# Altium PCB 无线调试增加.PcbDoc (part 1 of 2)
Units mil, origin at the board's own origin, x right, y up, seen from the top; angles counter-clockwise.
Board outline 3239.62 x 1968.5 mil, 2 copper layers (Top Layer, Bottom Layer); 90 components, 69 nets, 339 pads, 117 vias.
Unrouted connection lines stored in the file: 3.
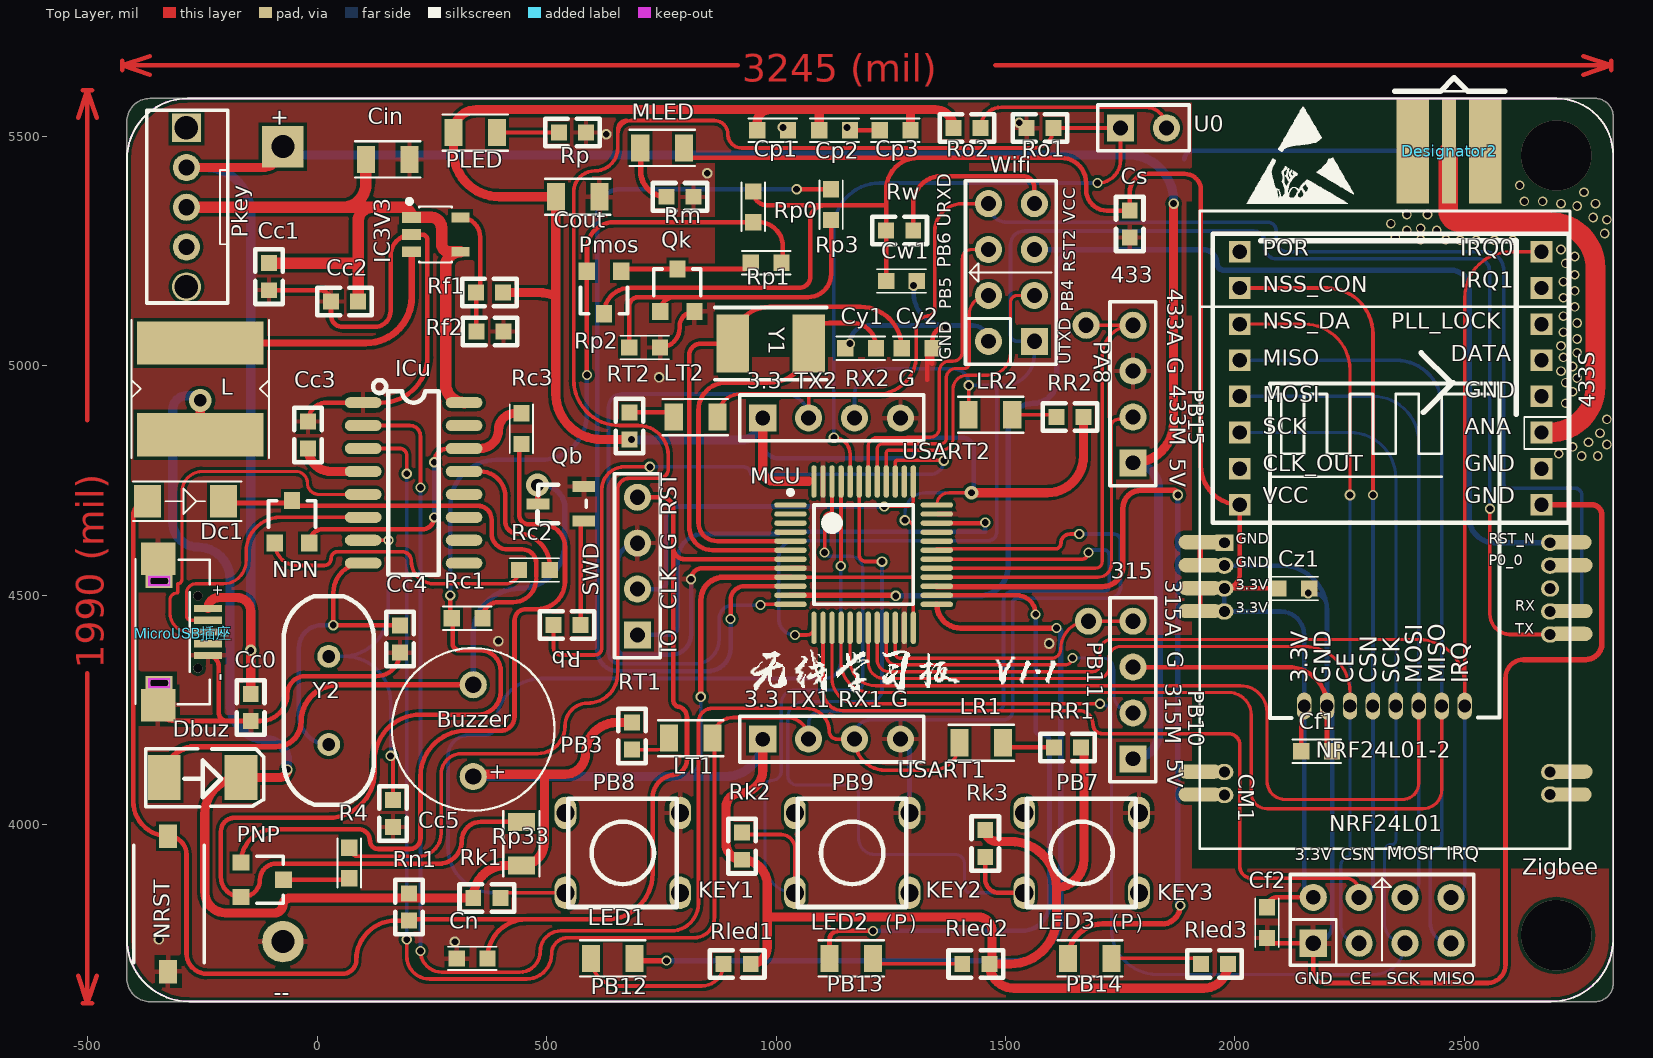
[diagram p0: Top Layer view]
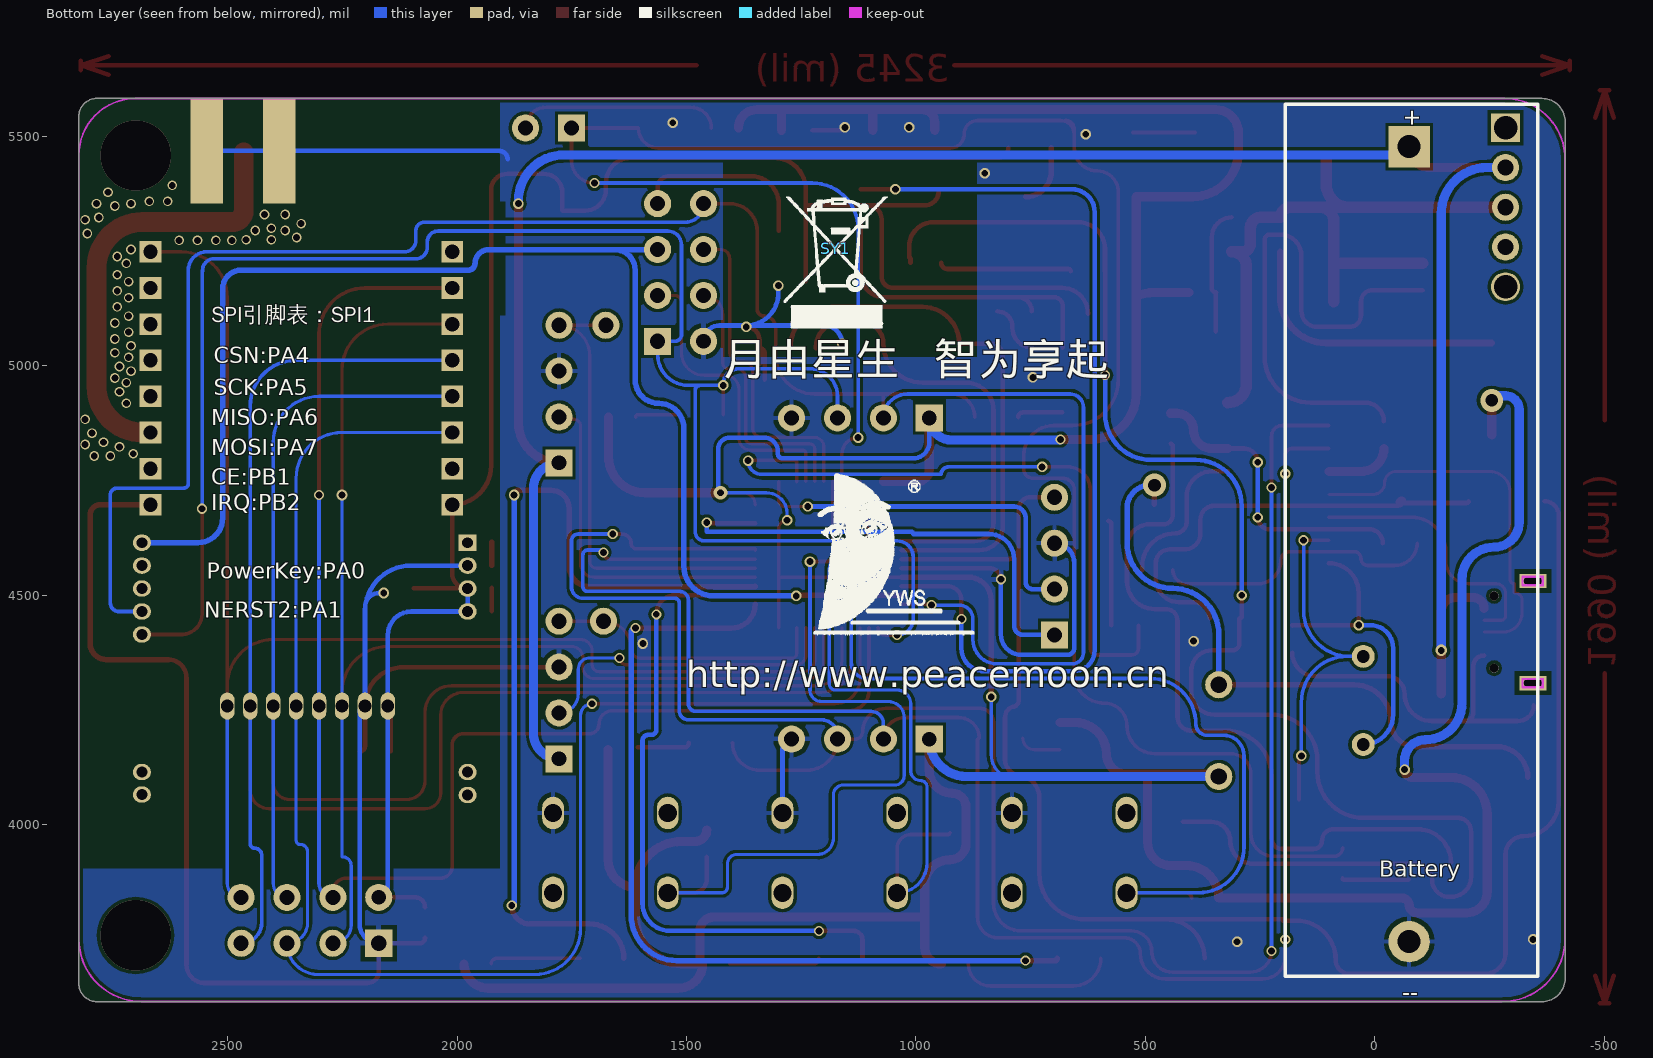
[diagram p1: Bottom Layer view, seen from below]

## Layer stack, top to bottom
Top Layer: signal copper 1.4
Dielectric: dielectric 12.6, FR-4, Dk 4.8
Bottom Layer: signal copper 1.4

## Board outline
-200,5582.96 2785.25,5582.96 cw(c2785.25,5543.59) 2824.62,5543.59 2824.62,3653.83 cw(c2785.25,3653.83) 2785.25,3614.46 -365,3614.46 cw(c-365,3664.46) -415,3664.46 -415,5532.96 cw(c-365,5532.96) -365,5582.96 -200,5582.96

## Design rules (kind name [scope] priority, off if disabled: settings)
Clearance [All] p1: gap=7
PolygonConnect [All] p1: connectstyle=Relief reliefconductorwidth=10 reliefentries=4 polygonreliefangle="90 Angle" airgapwidth=10
RoutingVias [All] p1: holewidth=28 width=50 viastyle="Through Hole" minholewidth=28 minwidth=50 maxholewidth=28 maxwidth=50
SolderMaskExpansion [All] p1: expansion=4
Width [All] p1: maxlimit=787.4 minlimit=7 preferedwidth=10
28 further rules are at their usual default settings.

## Classes and differential pairs
component class 无线调试版: 315 433 433S Battery Buzzer Cin Cn Cout Cp1 Cp2 Cp3 Cs Cy1 Cy2 Dbuz IC3V3 KEY1 KEY2 KEY3 LED1 LED2 LED3 LR1 LR2 LT1 LT2 MCU MLED NRF24L01 NRF24L01-2 NRST Pkey PLED Qb Rb Rf1 Rf2 Rk1 Rk2 Rk3 Rled1 Rled2 Rled3 Rm Rn1 Ro1 Ro2 Rp RR1 RR2 RT1 RT2 Rw SWD SY1 U0 USART1 USART2 Wifi Y1 Zigbee

## Components (designator, comment, footprint, x,y, rotation, side; value= is the part's Value field where it differs from the comment)
315 "2.54*4" 2.54*4 1775.95,4333.58 r90 top
433 "2.54*4" 2.54*4 1775.95,4978.58 r90 top
433S "思卡乐433核心板" 思卡乐433核心板 2010.95,5248.58 r0 top
Battery "锂电池座子（网蜂）" 锂电池插座（网蜂） -305,5520 r270 bottom locked
Buzzer "3V小蜂鸣器" 3V小蜂鸣器 340,4105 r90 top
Cc0 "" 0603A -145,4285 r270 top
Cc1 "104" 0603A -105,5165 r90 top
Cc2 "" 0603A 30,5140 r0 top
Cc3 "104" 0603A -20,4820 r90 top
Cc4 "22pf" 0603A 180,4375 r90 top
Cc5 "22pf" 0603A 165,3995 r90 top
Cf1 "104" 0603 2145,4160 r90 top (schematic designator Cp3)
Cf2 "104" 0603 2070,3820 r0 top (schematic designator Cp3)
Cin "10uf" 0805 110,5450 r270 top
Cn "104" 0603 370.95,3708.58 r270 top
Cout "22uf" 0805 610.95,5368.58 r90 top
Cp1 "104" 0603 1025.95,5513.58 r270 top
Cp2 "104" 0603 1160.95,5513.58 r270 top
Cp3 "104" 0603 1225.95,5513.58 r90 top
Cs "104" 0603A 1770.95,5338.58 r270 top
Cw1 "104" 0603 1240,5185 r90 top (schematic designator Cp3)
Cy1 "10-30P" 0603 1150.95,5038.58 r90 top
Cy2 "10-30P" 0603 1340.95,5038.58 r270 top
Cz1 "104" 0603 2095,4515 r90 top (schematic designator Cp3)
Dbuz "RB521S" 贴片二极管 -115,4100 r0 top
Dc1 "4148" DIO -370,4705 r0 top
Designator2 "Comment" 433天线 2338,5398.58 r0 top
IC3V3 "L408-3.3" SOT-23-5 205.95,5323.58 r270 top
ICu "CH340G" CH340G 210,4745 r0 top (schematic designator CH340G)
KEY1 "key4" key4 665.95,3938.58 r0 top
KEY2 "key4" key4 1165.94,3938.58 r0 top
KEY3 "key4" key4 1665.95,3938.58 r0 top
L "Comment" "774 2.2UH" -185,4830 r90 top
LED1 "LED" 0805 600.95,3708.58 r270 top
LED2 "LED" 0805 1207.61,3708.58 r90 top
LED3 "LED" 0805 1727.65,3708.58 r90 top
LR1 "LED" 0805 1490.95,4178.58 r90 top
LR2 "LED" 0805 1510.95,4893.58 r90 top
LT1 "LED" 0805 770.95,4188.58 r270 top
LT2 "LED" 0805 780.95,4888.58 r270 top
MCU "F0-MCU" STM32F103C8 1620.95,4558.58 r0 top
MicroUSB插座 "MicroUSB插座" MICRO-USB（带孔） -325,4420 r270 top
MLED "LED" 0805 795,5475 r90 top
NPN "9013" SOT23#1 -105,4660 r0 top
NRF24L01 "NRF24L01直插" NFR24L01直插 2320.95,3793.58 r0 top
NRF24L01-2 "NRF24L01贴片" nrf2401贴片 2150.95,4258.58 r0 top
NRST "KEY" KEY -325,3975 r270 top
Pkey "五孔开关" 五孔小开关 -285,5345 r270 top
PLED "LED" 0805 300.95,5508.58 r270 top
Pmos "AO3413" AO3413 625,5160 r180 top
PNP "PNP" SOT23#1 -120,3930 r270 top
Qb "9013" SOT23#2 540,4695 r270 top
Qk "9013" 9013 785,5165 r0 top
R4 "" 0603 70,3950 r0 top
Rb "1K" 0603A 515,4435 r0 top
Rc1 "" 0603 360,4450 r270 top
Rc2 "" 0603 440,4555 r90 top
Rc3 "" 0603 445,4830 r180 top
Rf1 "560R" 0603A 405,5160 r180 top
Rf2 "120R" 0603A 346.89,5075 r0 top
Rk1 "10K" 0603A 340,3840 r0 top
Rk2 "10K" 0603A 925.95,3923.58 r90 top
Rk3 "10K" 0603A 1455.95,3988.58 r270 top
Rled1 "560R" 0603A 885.85,3696.65 r0 top
Rled2 "560R" 0603A 1405.9,3696.65 r0 top
Rled3 "560R" 0603A 1925.94,3696.65 r0 top
Rm "1K" 0603A 760.95,5368.58 r0 top
Rn1 "10K" 0603A 200,3850 r270 top
Ro1 "10K" 0603A 1545.95,5518.58 r0 top
Ro2 "1K" 0603A 1445.95,5518.58 r180 top
Rp "1k" 0603A 585.95,5508.58 r180 top
Rp0 "0R" 0603 950.56,5313.31 r180 top
Rp1 "10k" 0603 945,5225 r90 top
Rp2 "10K" 0603 680,5040 r90 top
Rp3 "1K" 0603 1120,5385 r0 top
Rp33 "Comment" 0805 445,3915 r0 top
RR1 "560R" 0603A 1605.95,4168.58 r0 top
RR2 "560R" 0603A 1610.95,4888.58 r0 top
RT1 "560R" 0603A 685.95,4163.58 r90 top
RT2 "560R" 0603A 680.95,4898.58 r270 top
Rw "控制电流防止发热" 0603A 1240,5295 r0 top
SWD "2.54*4" 2.54*4 695.95,4603.58 r90 top
SY1 "PAD_1" HS 1175,5255 r180 bottom
U0 "二角跳帽" 二角跳帽 1750.95,5518.58 r0 top
USART1 "2.54*4" 2.54*4 1160.95,4188.58 r0 top
USART2 "2.54*4" 2.54*4 1160.95,4888.58 r0 top
Wifi "Wifi（20）" Wifi（20） 590.95,5373.58 r90 top (schematic designator Wifi2)
Y1 "8M" Crystal 1070.95,5048.58 r270 top
Y2 "12M" XTAL_US 25,4175 r90 top
Zigbee "Zigbee_S" Zigebee_S 2320.95,4518.58 r0 top

## Footprints (in the part's own frame and the unit in brackets; to place one, negate y for a bottom-side part, rotate by r counter-clockwise, add the part's x,y. Pads: shape width x height; smd on the part's side, far side on the other; paste and mask are expansions set on the pad)
2.54*4 [mil]
  rect 59.06x59.06 hole 32: 1(-190,-2)
  round 59.06 hole 33: 2(-90,-2) 3(10,-2) 4(110,-2)
  silkscreen extent -240,-52 161,48
3V小蜂鸣器 [mm]
  round 1.5 hole 0.9: 1(0,0) 2(5.08,0)
  silkscreen extent -1.89,-4.5 7.11,4.5
433天线 [mm]
  rect 1.8x5.8 smd: 1(1.27,1.778) 3(5.27,1.778)
  rect 0.8x5.8 smd: 2(3.27,1.778)
  rect 1.8x5.8 smd far side: 4(1.27,1.778) 5(5.27,1.778)
  rect 1.8x5.8 on Top Solder: 11(1.27,1.778) 33(5.27,1.778)
  rect 0.8x5.8 on Top Solder: 22(3.27,1.778)
  rect 1.8x5.8 on Bottom Solder: 44(1.27,1.778) 55(5.334,1.778)
  silkscreen extent 0.25,-1.52 6.35,5.84
0603 [mm]
  rect 0.9x0.9 smd: 1(0,0) 2(0,-1.7)
  silkscreen extent -0.65,-2.2 0.65,0.5, body extent -0.5,-1.59 0.5,-0.19, height 0.7
0603A [mm]
  rect 0.88x0.88 smd: 1(0,0) 2(1.5,0)
  silkscreen extent -0.76,-0.76 2.26,0.76, body extent 0,-0.54 1.5,0.54, height 1.45
"774 2.2UH" [mil]
  rect 94.49x275.59 smd: 1(20,70) 2(220,70)
  silkscreen extent -30,-80 270,220
0805 [mm]
  rect 1.5x1 smd: 1(0,-0.1) 2(0,2.311)
  silkscreen extent -1,-0.7 1,2.9, body extent -0.76,0.13 0.76,2.16, height 0.8
9013 [mm]
  rect 0.9x0.95 smd: 1(-0.95,-1.175) 2(0.95,-1.175) 3(0,1.175)
  silkscreen extent -1.3,-0.3 1.3,1.18
AO3413 [mm]
  rect 0.9x0.95 smd: 1(-0.95,-1.175) 2(0.95,-1.175) 3(0,1.175)
  silkscreen extent -1.3,-0.3 1.3,1.18
CH340G [mil]
  oval 80x24 smd: 1(-110,175) 2(-110,125) 3(-110,75) 4(-110,25) 5(-110,-25) 6(-110,-75) 7(-110,-125) 8(-110,-175) 9(110,-175) 10(110,-125) 11(110,-75) 12(110,-25) 13(110,25) 14(110,75) 15(110,125) 16(110,175)
  silkscreen extent -88,-200 55,224
Crystal [mm]
  rect 3.2x1.8 smd: 1(0,0) 2(0,-4.2)
  silkscreen extent -2,-5.2 2,1, body extent -2.03,-4.95 2.03,0.76, height 1.5
DIO [mm]
  rect 1.5x1.8 smd: A(0,0) K(4.2,0)
  silkscreen extent -0.8,-1.1 5.2,1.1
HS [mil]
  silkscreen extent -113,-173 113,113
KEY [mm]
  rect 1.3x1 smd: 1(0,0) 2(7.5,0)
  silkscreen extent 0.5,-1.9 7,2
key4 [mm]
  oval 1.2x1.8 hole 1: 1(-3.175,-2.21) 2(-3.175,2.21) 3(3.175,-2.21) 4(3.175,2.21)
  silkscreen extent -3.02,-3 3,3
MICRO-USB（带孔） [mm]
  rect 0.4x1.55 smd: 1(-1.3,2.2) 2(-0.65,2.2) 3(0,2.2) 4(0.65,2.2) 5(1.3,2.2)
  rect 1.8x1.9 smd: 6(-4.05,-0.55) 6(4.05,-0.55)
  rect 0.8x1.5 hole 0.4 slot 1 at 90 deg: 6(-2.825,-0.5) 6(2.825,-0.5)
  round 0.5 hole 0.5 unplated: ""(-2,1.65) ""(2,1.65)
  Keep-Out Layer lines w0.127: 3.054,-1.043 2.596,-1.043 2.596,0.075 3.054,0.075 3.054,-1.043 ; -2.596,-1.043 -3.054,-1.043 -3.054,0.075 -2.596,0.075 -2.596,-1.043
  silkscreen extent -4.05,-1.8 4,2.3
NFR24L01直插 [mil]
  rect 59.06x59.06 hole 33: 1(-150,-52)
  round 59.06 hole 32: 2(-150,48)
  round 59.06 hole 33: 3(-50,-52) 4(-50,48) 5(50,-52) 6(50,48) 7(150,-52) 8(150,48)
  silkscreen extent -200,-100 200,98
nrf2401贴片 [mm]
  oval 0.8x1.5 hole 0.7: 1(0,0) 2(1.27,0) 3(2.54,0) 4(3.81,0) 5(5.08,0) 6(6.35,0) 7(7.62,0) 8(8.89,0)
  silkscreen extent -1.88,-0.66 10.82,17.86
SOT23#1 [mm]
  rect 0.9x0.95 smd: 1(0.32,-1.175) 2(2.22,-1.175) 3(1.27,1.175)
  silkscreen extent -0.03,-0.3 2.57,1.18
SOT23#2 [mm]
  rect 0.6x1.27 smd: 1(0.84,1.04) 2(-1.065,1.04) 3(-0.1,-1.5)
  silkscreen extent -1.18,-1.52 0.97,1.17, body extent -1.56,-0.86 1.36,0.86, height 1.5
SOT-23-5 [mm]
  rect 0.6x1.05 smd: 1(0,0) 2(0.95,0) 3(1.9,0)
  rect 0.55x1 smd: 4(1.9,2.7) 5(0,2.7)
  silkscreen extent -1.01,-0.25 2.49,2.22, body extent -0.49,0 2.41,2.8, height 1.09
STM32F103C8 [mm]
  oval 1.8x0.3 smd: 1(-14.972,3.512) 2(-14.972,3.012) 3(-14.972,2.512) 4(-14.972,2.012) 5(-14.972,1.512) 6(-14.972,1.012) 7(-14.972,0.512) 8(-14.972,0.012) 9(-14.972,-0.488) 10(-14.972,-0.988) 11(-14.972,-1.488) 12(-14.972,-1.988) 25(-6.872,-1.988) 26(-6.872,-1.488) 27(-6.872,-0.988) 28(-6.872,-0.488) 29(-6.872,0.012) 30(-6.872,0.512) 31(-6.872,1.012) 32(-6.872,1.512) 33(-6.872,2.012) 34(-6.872,2.512) 35(-6.872,3.012) 36(-6.872,3.512)
  oval 0.3x1.8 smd: 13(-13.672,-3.288) 14(-13.172,-3.288) 15(-12.672,-3.288) 16(-12.172,-3.288) 17(-11.672,-3.288) 18(-11.172,-3.288) 19(-10.672,-3.288) 20(-10.172,-3.288) 21(-9.672,-3.288) 22(-9.172,-3.288) 23(-8.672,-3.288) 24(-8.172,-3.288) 37(-8.172,4.812) 38(-8.672,4.812) 39(-9.172,4.812) 40(-9.672,4.812) 41(-10.172,4.812) 42(-10.672,4.812) 43(-11.172,4.812) 44(-11.672,4.812) 45(-12.172,4.812) 46(-12.672,4.812) 47(-13.172,4.812) 48(-13.672,4.812)
  silkscreen extent -15.1,-1.99 -8.17,4.34, body extent -14.42,-2.74 -7.42,4.26, height 1.6
Wifi（20） [mil]
  rect 59.06x59.06 hole 33: 1(-320,-972)
  round 59.06 hole 32: 2(-320,-872)
  round 59.06 hole 33: 3(-220,-972) 4(-220,-872) 5(-120,-972) 6(-120,-872) 7(-20,-972) 8(-20,-872)
  silkscreen extent -370,-1020 30,-822
XTAL_US [mil]
  round 50 hole 28: 1(-0.24,-0.13) 2(191.89,-0.13)
  silkscreen extent -131,-99 323,98
Zigebee_S [mm]
  oval 1x0.9 hole 0.6: 1(9.3,2.44) 2(9.3,1.17) 3(9.3,-0.1) 4(9.3,-1.37) 5(9.3,-2.64) 11(9.3,-10.26) 12(9.3,-11.505) 13(-8.734,-11.53) 14(-8.734,-10.26) 21(-8.734,-1.37) 22(-8.734,-0.1) 23(-8.734,1.17)
  oval 2.4x0.8 smd: 1(10.4,2.47) 12(10.4,-11.5) 13(-10.069,-11.5) 14(-10.069,-10.23) 21(-10.069,-1.34) 22(-10.069,-0.07) 23(-10.069,1.2) 24(-10.069,2.47)
  oval 2.5x0.8 smd: 2(10.4,1.2) 4(10.4,-1.34) 5(10.4,-2.61) 11(10.4,-10.23)
  rect 1x0.9 hole 0.6: 24(-8.734,2.44)
  Multi-Layer pour cut-out: -10.846,15 10.846,15 10.846,21.351 -10.846,21.351
  silkscreen extent -10.1,-14.5 10.41,20.8
二角跳帽 [mm]
  rect 1.5x1.5 hole 0.813: 1(0,0)
  round 1.5 hole 0.838: 2(2.54,0)
  silkscreen extent -1.27,-1.27 3.81,1.27
五孔小开关 [mm] "Connector; Header; 6 Position"
  rect 1.6x1.6 hole 1.3: 1(-4.42,0)
  round 1.5 hole 0.9: 2(-2.22,0) 3(-0.02,0) 4(2.18,0)
  round 1.6 hole 1.3: 5(4.38,0)
  silkscreen extent -5.38,-2.21 5.28,2.31
思卡乐433核心板 [mm]
  rect 1.2x1.2 hole 0.8: 1(0,0) 2(0,-2) 3(0,-4) 4(0,-6) 5(0,-8) 6(0,-10) 7(0,-12) 8(0,-14) 9(16.7,0) 10(16.7,-2) 11(16.7,-4) 12(16.7,-6) 13(16.7,-8) 14(16.7,-10) 15(16.7,-12) 16(16.7,-14)
  silkscreen extent -1.5,-15 18.2,1
贴片二极管 [mm]
  rect 1.8x2.5 smd: A(-5.55,0.075) K(-1.3,0.075)
  silkscreen extent -6.57,-1.55 -0.05,1.68
锂电池插座（网蜂） [mil]
  rect 90x90 hole 50: 1(42.13,-230)
  round 90 hole 50: 2(1775,-230)
  silkscreen extent -50,-500 1850,50

## Part data
Cc0 Cc1 Cc2 Cc3 Cc4 Cc5 Cin Cout Cs: library part CAP, "Capacitor"
Cf1 Cf2 Cp1 Cp2 Cp3 Cw1 Cy1 Cy2 Cz1: library part cap/0805
Cn: library part CAP_1, "Capacitor"
Dc1: library part DIO
NPN Qb: library part NPN
R4 Rb Rc1 Rc2 Rc3 Ro1 Ro2 Rp0 Rp1 Rp2 Rp3: library part R
Rf1 Rf2 Rk1 Rk2 Rk3 Rp Rw: library part res
Rled1 Rled2 Rled3 Rm RR1 RR2 RT1 RT2: library part R_1
Rn1: library part RES2
Y1: library part crystal
Y2: library part XTAL, "Crystal Oscillator"

## Free pads (board coordinates)
  round 59.05 hole 33: 0(1675.95,5088.58) 0(1680.95,4443.58)

## Via types
v1: diameter 21, hole 15, Top Layer to Bottom Layer, 52 vias
v2: diameter 22, hole 15, Top Layer to Bottom Layer, 30 vias
v3: diameter 23, hole 15, Top Layer to Bottom Layer, 29 vias
v4: diameter 50, hole 28, Top Layer to Bottom Layer, 2 vias
v5: diameter 153.54, hole 153.54, Top Layer to Bottom Layer, 2 vias
v6: diameter 25, hole 15, Top Layer to Bottom Layer, 1 vias
v7: diameter 30, hole 15, Top Layer to Bottom Layer, 1 vias

## Nets (pads, with @x,y where several pads share a name; then routed paths per layer and width w, separated by ;. In a path a pad name is that pad's centre, name@x,y a point inside that pad or via, vN(x,y) a via of type N, cw(c..) or ccw(c..) an arc to the next point about the centre after c; other vN are vias at no path point)
3.3PWD: 433S.8 Cf1.1 Cf2.1 Cs.1 Cw1.1 Cz1.1 MLED.1 NRF24L01-2.1 NRF24L01.2 Pmos.3 Rp0.2 Rw.1 Zigbee.21 Zigbee.22 | length 4729.3
  Top Layer w10: Pmos.3@625,5113.74 cw(c681.26,5113.74) 681.26,5170 1050,5170 ccw(c1050,5195) 1075,5195 1075,5320 cw(c1105,5320) 1105,5350 ; MLED.1@798.94,5475 ccw(c820.35,5475) 820.35,5453.58 1310,5453.58 ; Rp0.2@950.56,5380.23 ccw(c980.8,5380.23) 980.8,5350 1105,5350 ; Cw1.1@1240,5185 Rw.1@1240,5295 1240,5350 ; Zigbee.21@1924.54,4465.83 Zigbee.22@1924.54,4515.83 ; Zigbee.22@1977.09,4515 Zigbee.22@1981.98,4515 ; Cf2.1@2070,3820 cw(c2091.58,3820) 2091.58,3841.58 NRF24L01.2@2170.94,3841.58 ; Cz1.1@2095,4515 Zigbee.22@1981.98,4515 ; Cf1.1@2145,4160 2145,4252.64 cw(c2150.95,4252.64) NRF24L01-2.1@2150.95,4258.58 ; 1105,5350 1240,5350 ; 1240,5350 1240,5383.58 cw(c1310,5383.58) 1266.67,5438.56 cw(c1310,5383.58) 1310,5453.58 ; 1310,5453.58 1620.95,5453.58 cw(c1620.95,5398.58) 1675.95,5398.58 1675.95,5383.58 ccw(c1720.95,5383.58) 1720.95,5338.58 Cs.1@1770.95,5338.58 1770.95,5378.58 cw(c1810.95,5378.58) 1810.95,5418.58 1890.95,5418.58 cw(c1890.95,5383.58) 1925.95,5383.58 1925.95,4782.4 ccw(c2010.95,4782.4) 433S.8@2010.95,4697.4 2010.95,4548.5 cw(c1977.09,4548.5) Zigbee.22@1981.98,4515
  Bottom Layer w10: Zigbee.22@1977.09,4514.65 Zigbee.21@1977.09,4464.65 2099.88,4464.65 cw(c2099.88,4413.58) 2110.25,4463.58 cw(c2099.88,4413.58) 2150.95,4413.58 NRF24L01-2.1@2150.95,4258.58 2150.95,3861.58 ccw(c2170.94,3861.58) NRF24L01.2@2170.94,3841.58
3.3V: Pmos.2 PNP.2 Rc1.2 Rp0.1 Rp1.2 Rp33.2 | length 3426.5
  Top Layer w10: v2(290,4500) 290,4453.07 ccw(c293.07,4453.07) Rc1.2@293.07,4450 cw(c293.07,4448.07) 295,4448.07 295,4395 ccw(c310,4395) 310,4380 355,4380 cw(c355,4335) 400,4335 400,4290 cw(c350,4290) 350,4240 225,4240 ccw(c225,4140) 125,4140 125,4115 cw(c25,4115) 25,4015 -180.62,4015 ccw(c-180.62,3985.62) -210,3985.62 -210,3886.34 ccw(c-166.26,3886.34) PNP.2@-166.26,3842.6 -162.4,3842.6 ccw(c-162.4,3880) -125,3880 cw(c-90,3880) -90,3915 265,3915 ccw(c265,3965) 315,3965 cw(c356,3965) 356,4006 Rp33.2@418,4006 ; v2(587.6,4980) Pmos.2@587.6,5206.26 587.97,5206.26 587.97,5254.69 cw(c646.59,5254.69) 646.59,5313.31 Rp0.1@950.56,5313.31 961.69,5313.31 cw(c961.69,5260) 1015,5260 1015,5237.65 cw(c1003.99,5237.65) 1014.91,5236.22 ccw(c1014.91,5233.24) 1011.93,5233.24 Rp1.2@1011.93,5225
  Bottom Layer w10: v2(290,4500) 290,4695 cw(c390,4695) 390,4795 487.6,4795 ccw(c487.6,4895) 587.6,4895 v2(587.6,4980)
5V: 315.1 433.1 Battery.1 Cc0.1 MicroUSB插座.1 Pkey.2 | length 5029.2
  Top Layer w20: Pkey.2@-285,5432.38 -120.48,5432.38 ccw(c-120.48,5477.87) Battery.1@-75,5477.87 ; MicroUSB插座.1@-238.39,4471.18 cw(c-214.57,4471.18) -214.57,4495 -175,4495 cw(c-175,4465) -145,4465 v6(-145,4380) Cc0.1@-145,4285 ; 433.1@1777.95,4788.58 ccw(c1777.95,4877.13) 1866.49,4877.13 v3(1866.49,5353.58)
  Bottom Layer w20: Pkey.2@-285,5432.38 -245,5432.38 cw(c-245,5332.38) -145,5332.38 v6(-145,4380) ; Battery.1@-75,5477.87 ccw(c-57.13,5477.87) -57.13,5460 1766.49,5460 cw(c1766.49,5360) 1866.49,5360 v3(1866.49,5353.58) ; 315.1@1777.95,4143.58 ccw(c1777.95,4199.58) 1833.95,4199.58 1833.95,4732.58 ccw(c1777.95,4732.58) 433.1@1777.95,4788.58
5VOUT: Cc1.2 Cc2.2 Cin.1 IC3V3.1 IC3V3.4 ICu.16 Pkey.3 | length 1593.9
  Top Layer w25: Pkey.3@-285,5345.77 -135,5345.77 55,5345.77 ; Cc1.2@-105,5224.06 80,5224.06 cw(c80,5215) 89.06,5215 ; Cc2.2@89.06,5140 89.06,5215 ; Cin.1@106.06,5450 106.06,5396.83 cw(c55,5396.83) 55,5345.77 ; IC3V3.1@205.95,5323.58 IC3V3.1@205.95,5323.75 ; ICu.16@320,4920 cw(c320,4960) 280,4960 280,5216.54 cw(c312.24,5216.54) IC3V3.4@312.24,5248.78 287.76,5248.78 cw(c287.76,5265.58) 270.96,5265.58 270.96,5300.86 ccw(c248.07,5300.86) 248.07,5323.75 IC3V3.1@205.95,5323.75 ; 55,5345.77 120,5345.77 ; 89.06,5215 89.06,5314.83 cw(c120,5314.83) 120,5345.77 ; 120,5345.77 183.76,5345.77 cw(c183.76,5323.58) IC3V3.1@205.94,5323.75
315A: 315.4 MCU.22 pad.0@1680.95,4443.58 | length 626.1
  Top Layer w7: MCU.22@1259.84,4429.13 1259.84,4373.68 ccw(c1270.95,4373.68) 1270.95,4362.58 1599.94,4362.58 ccw(c1599.94,4383.2) 1620.56,4383.2 cw(c1680.95,4383.2) pad.0@1680.95,4443.58 315.4@1777.95,4443.58
315M: 315.2 MCU.21 | length 709.2
  Top Layer w7: MCU.21@1240.16,4429.13 1240.16,4369.37 ccw(c1260.95,4369.37) 1260.95,4348.58 1630.95,4348.58 ccw(c1630.95,4363.58) v2(1645.95,4363.58)
  Bottom Layer w7: v2(1645.95,4363.58) 1710.95,4363.58 cw(c1710.95,4338.58) 1735.95,4338.58 1735.95,4285.58 ccw(c1777.95,4285.58) 315.2@1777.95,4243.58
433A: 433.4 MCU.29 pad.0@1675.95,5088.58 | length 1024.1
  Top Layer w7: MCU.29@1350.39,4559.06 1696.42,4559.06 ccw(c1696.42,4573.58) 1710.95,4573.58 1710.95,5021.58 cw(c1777.95,5021.58) 433.4@1777.95,5088.58 pad.0@1675.95,5088.58
433M: 433.2 MCU.28 | length 755.6
  Top Layer w7: MCU.28@1350.39,4539.37 1701.73,4539.37 ccw(c1701.73,4568.58) 1730.95,4568.58 1730.95,4868.58 cw(c1745.95,4868.58) 1745.95,4883.58 1772.94,4883.58 ccw(c1772.94,4888.58) 433.2@1777.95,4888.58
+3.3V: Buzzer.1 Cout.2 Cp1.2 Cp2.2 Cp3.2 Dbuz.K L.1 MCU.9 MCU.24 MCU.36 MCU.48 PLED.1 Rf1.1 Rk1.1 Rk2.1 Rk3.1 Rled1.2 Rled2.2 Rled3.2 Rn1.1 Ro2.2 Rp33.1 RR1.2 RR2.2 RT1.2 RT2.2 USART1.1 USART2.1 | length 11564.5
  Top Layer w7: MCU.9@1031.5,4539.37 1298.43,4539.37 cw(c1298.43,4538.58) 1299.21,4538.58 ; v3(1280.95,4663.58) cw(c1280.95,4645.31) 1299.21,4645.31 1299.21,4538.58 ; MCU.24@1299.21,4429.13 1299.21,4538.58 ; MCU.36@1350.39,4696.85 cw(c1377.13,4696.85) 1377.13,4723.58 v7(1425.95,4723.58)
  Top Layer w12: v3(835.95,4278.58) 835.95,4489.37 cw(c885.95,4489.37) 885.95,4539.37 MCU.9@1031.5,4539.37
  Top Layer w20: L.1@-255,4850 v4(-255,4925) ; v3(-65,4120) cw(c-82.05,4120) -82.05,4102.95 Dbuz.K@-166.18,4102.95 ccw(c-166.18,4024.13) -245,4024.13 -245,3852.88 ccw(c-200,3852.88) -200,3807.88 -92.12,3807.88 ccw(c-92.12,3825) -75,3825 cw(c-60,3825) -60,3840 Rk1.1@340,3840 cw(c411.06,3840) 411.06,3911.06 Rp33.1@445,3911.06 ccw(c445,3961.06) 495,3961.06 495,4110 ; Buzzer.1@340,4105 cw(c345,4105) 345,4110 495,4110 ; Rf1.1@405,5160 480.95,5160 cw(c480.95,5060) 519.94,5152.08 ; RT2.2@680.94,4839.53 619.94,4839.53 cw(c619.94,4939.53) 519.94,4939.53 519.94,5152.08 ; RT1.2@685.95,4222.64 652.64,4222.64 ccw(c652.64,4155) 585,4155 cw(c540,4155) 540,4110 495,4110 ; Rled1.2@944.91,3696.65 ccw(c944.91,3732.69) 980.95,3732.69 980.95,3793.58 ; Cp1.2@959.02,5513.58 959.02,5531.65 cw(c985.95,5531.65) 985.95,5558.58 ; USART1.1@970.95,4186.58 970.95,4118.58 cw(c920.95,4118.58) 920.95,4068.58 ccw(c920.95,4038.58) 890.95,4038.58 890.95,3958.58 ccw(c925.94,3958.58) Rk2.1@925.94,3923.58 cw(c925.94,3868.58) 980.95,3868.58 980.95,3793.58 ; USART2.1@970.95,4886.58 970.95,4773.58 ccw(c995.95,4773.58) 995.95,4748.58 1070.95,4748.58 1070.95,4748.03 ; Cp2.2@1094.02,5513.58 1094.02,5556.65 cw(c1095.95,5556.65) 1095.95,5558.58 ; Cp3.2@1292.87,5513.58 1292.87,5555.51 cw(c1295.95,5555.51) 1295.95,5558.58 ; Ro2.2@1386.89,5518.58 ccw(c1346.89,5518.58) 1346.89,5558.58 1295.95,5558.58 ; v7(1425.95,4723.58) 1590.95,4723.58 ccw(c1590.95,4802.64) 1670,4802.64 RR2.2@1670,4888.58 ; Rk3.1@1455.95,3988.58 ccw(c1480.95,3988.58) 1480.95,3963.58 1510.95,3963.58 cw(c1510.95,3863.58) 1610.95,3863.58 ; RR1.2@1670.95,4163.58 1670.95,3923.58 cw(c1610.95,3923.58) 1610.95,3863.58 ; Rled3.2@1985,3696.65 cw(c1931.93,3696.65) 1931.93,3643.58 1518.02,3643.58 cw(c1518.02,3696.65) Rled2.2@1464.95,3696.65 ; 519.94,5152.08 Cout.2@519.94,5368.58 397.01,5368.58 cw(c397.01,5468.58) 297.01,5468.58 PLED.1@297.01,5508.58 cw(c347.01,5508.58) 347.01,5558.58 985.95,5558.58 ; 980.95,3793.58 cw(c985.95,3793.58) 985.95,3798.58 1440.95,3798.58 cw(c1440.95,3768.58) 1470.95,3768.58 1470.95,3702.65 cw(c1464.95,3702.65) Rled2.2@1464.95,3696.65 ; 985.95,5558.58 1095.95,5558.58 ; 1095.95,5558.58 1295.95,5558.58 ; Rled2.2@1464.95,3696.65 1510.95,3696.65 ccw(c1510.95,3796.65) 1610.95,3796.65 1610.95,3863.58
  Bottom Layer w7: 806.73,4105 ccw(c780.95,4153.58) 835.95,4153.58 v3(835.95,4278.58) ; v3(1280.95,4663.58) 1280.95,4678.58 cw(c1325.95,4678.58) 1325.95,4723.58 v7(1425.95,4723.58)
  Bottom Layer w10: USART2.1@970.95,4886.58 970.95,4833.58 ccw(c1005.95,4833.58) 1005.95,4798.58 1290.95,4798.58 ccw(c1290.95,4808.58) 1300.95,4808.58 1300.95,4813.58 cw(c1330.95,4813.58) 1330.95,4843.58 1405.95,4843.58 cw(c1405.95,4818.58) 1430.95,4818.58 1430.95,4728.58 cw(c1425.95,4728.58) v7(1425.95,4723.58)
  Bottom Layer w20: v4(-255,4925) ccw(c-265,4925) -265,4935 -285,4935 ccw(c-285,4905) -315,4905 -315,4660 ccw(c-260,4660) -260,4605 cw(c-260,4535) -190,4535 -190,4265 ccw(c-110,4265) -110,4185 cw(c-110,4140) -65,4140 v3(-65,4120) ; Buzzer.1@340,4105 806.73,4105 889.36,4105 ccw(c889.36,4186.58) USART1.1@970.95,4186.58 ; v2(685,4839.53) 685.94,4838.58 922.94,4838.58 ccw(c922.94,4886.58) USART2.1@970.95,4886.58
ALL_RX: LT2.2 MCU.12 USART2.2 Wifi.8 Zigbee.4 | length 4706.8
  Top Layer w8: LT2.2@871.94,4888.58 cw(c921.95,4888.58) 921.95,4938.58 1071.58,4938.58 ; v2(965.95,4478.58) cw(c967.68,4478.58) 967.68,4480.32 MCU.12@1031.5,4480.32 ; USART2.2@1070.95,4886.58 1070.95,4933.58 cw(c1090.95,4933.58) 1071.58,4938.58 ; Wifi.8@1462.94,5353.58 1405.94,5353.58 ccw(c1405.94,5293.58) 1345.95,5293.58 1345.95,5123.58 cw(c1330.95,5123.58) 1330.95,5108.58 ccw(c1330.95,5083.58) 1305.95,5083.58 1305.95,5023.58 cw(c1220.95,5023.58) 1220.95,4938.58 1071.58,4938.58
  Bottom Layer w8: v2(965.95,4478.58) 905.95,4478.58 ccw(c905.95,4448.58) 875.95,4448.58 875.95,4403.58 cw(c822.95,4403.58) 822.95,4350.58 659.42,4350.58 cw(c659.42,4375) 635,4375 635,4910 cw(c663.58,4910) 663.58,4938.58 1018.95,4938.58 cw(c1018.95,4886.58) USART2.2@1070.95,4886.58 ; Wifi.8@1462.94,5353.58 ccw(c1503.47,5353.58) 1503.47,5313.05 2071.95,5313.05 cw(c2071.95,5295) 2090,5295 2090,5273.58 ccw(c2115,5273.58) 2115,5248.58 2545.95,5248.58 cw(c2545.95,5208.58) 2585.95,5208.58 2585.95,4743.58 ccw(c2595.95,4743.58) 2595.95,4733.58 2740.95,4733.58 cw(c2740.95,4718.58) 2755.95,4718.58 2755.95,4483.58 cw(c2737.01,4483.58) 2737.01,4464.65 Zigbee.4@2687.09,4464.65
ALL_TX: LR2.2 MCU.13 USART2.3 Wifi.1 Zigbee.5 | length 3975.1
  Top Layer w8: v2(1040.95,4413.58) 1067.13,4413.58 ccw(c1067.13,4429.13) MCU.13@1082.68,4429.13 ; LR2.2@1419.95,4893.58 v3(1419.95,4957.58) ; v2(2555.95,4688.58) 2555.95,4459.65 ccw(c2600.95,4459.65) 2598.55,4414.71 ccw(c2600.95,4459.65) 2600.95,4414.65 Zigbee.5@2687.09,4414.65
  Bottom Layer w8: v2(1040.95,4413.58) cw(c1040.95,4448.58) 1005.95,4448.58 1005.95,4583.58 cw(c1040.95,4583.58) 1040.95,4618.58 1460.95,4618.58 ccw(c1460.95,4638.58) 1480.95,4638.58 1480.95,4947.58 ccw(c1470.95,4947.58) 1470.95,4957.58 ; USART2.3@1170.95,4886.58 1170.95,4933.58 cw(c1230.95,4933.58) 1230.95,4993.58 1385.95,4993.58 cw(c1385.95,4958.58) 1420.95,4958.58 ccw(c1420.95,4957.58) v3(1419.95,4957.58) 1470.95,4957.58 ; Wifi.1@1562.94,5053.58 1525.95,5053.58 cw(c1525.95,5068.58) 1510.95,5068.58 1510.95,5263.58 cw(c1541.47,5263.58) 1541.47,5294.11 2040.89,5294.11 cw(c2040.89,5270) 2065,5270 2065,5258.58 ccw(c2090,5258.58) 2090,5233.58 2529.76,5233.58 cw(c2529.76,5208.43) 2553.09,5217.84 cw(c2529.76,5208.43) 2554.91,5208.43 cw(c2455.95,5194.11) 2555.95,5194.11 v2(2555.95,4688.58) ; Wifi.1@1563.64,5053.55 1562.94,5038.14 1562.94,5024.58 cw(c1495.95,5024.58) 1495.95,4957.58 1470.95,4957.58
ANA: 433S.14 Designator2.2 | length 952.3
  Top Layer w43.31: Designator2.2@2465,5465.32 2465,5338.58 ccw(c2490,5338.58) 2490,5313.58 2685.95,5313.58 cw(c2685.95,5213.58) 2785.95,5213.58 2785.95,4954.88 cw(c2685.95,4954.88) 2685.95,4854.88 433S.14@2668.43,4854.88
BOOT0: MCU.44 R4.1 Ro1.2 U0.1 | length 4899.4
  Top Layer w8: R4.1@70,3950 ccw(c89,3950) 89,3931 220,3931 ccw(c220,3981) 270,3981 270,4110 cw(c315,4110) 315,4155 480,4155 ccw(c480,4215) 540,4215 cw(c590,4215) 560.18,4255.13 cw(c590,4215) 590,4265 ccw(c590,4330) 600.22,4265.81 ccw(c590,4330) 655,4330 655,4730 cw(c680,4730) 680,4755 745,4755 ccw(c745,4775) 765,4775 765,4805 ccw(c700,4805) 700,4870 658.88,4870 cw(c658.88,4970) 641.39,4871.54 cw(c658.88,4970) 558.88,4970 558.88,5378.88 cw(c605,5378.88) 605,5425 ccw(c605,5475) 655,5475 655,5505 ; 674.26,5535 ccw(c674.26,5515.74) 655,5515.74 655,5505 ; v3(1125.95,4843.58) cw(c1125.95,4808.11) 1161.42,4808.11 MCU.44@1161.42,4748.03 ; v2(1700.95,5398.58) ccw(c1700.95,5448.58) 1750.95,5448.58 U0.1@1750.95,5518.58 Ro1.2@1605,5518.58 cw(c1561.42,5518.58) 1561.42,5475 925,5475 cw(c925,5505) 895,5505 ccw(c865,5505) 865,5535 685,5535 ccw(c685,5505) 655,5505
  Bottom Layer w8: v3(1125.95,4843.58) 1125.95,5298.58 cw(c1225.95,5298.58) 1225.95,5398.58 v2(1700.95,5398.58)
BUZZER: MCU.39 Rb.1 | length 1468.5
  Top Layer w8: Rb.1@515,4435 515,4385 ccw(c530,4385) 530,4370 605,4370 ccw(c605,4385) 620,4385 620,4730 cw(c670,4730) 670,4780 v3(725,4780) ; MCU.39@1259.84,4748.03 1259.84,4788.36 cw(c1265.95,4788.36) 1265.95,4794.46 1365.06,4794.46 cw(c1365.06,4793.58) v3(1365.95,4793.58)
  Bottom Layer w8: v3(725,4780) 928.58,4780 cw(c928.58,4763.58) 945,4763.58 1335.95,4763.58 ccw(c1335.95,4793.58) v3(1365.95,4793.58)
CH340D+: ICu.5 MicroUSB插座.3 | length 834.1
  Top Layer w7: MicroUSB插座.3@-238.39,4420 -280,4420 cw(c-280,4461.05) -321.05,4461.05 -321.05,4489.66 cw(c-305.73,4489.66) -305.73,4504.97 ccw(c-305.73,4506.55) -304.75,4505.31 ccw(c-305.73,4506.55) -304.16,4506.55 -304.16,4525 ccw(c-304.16,4534.16) -295,4534.16 -295,4725 cw(c-250,4725) -250,4770 -46.73,4770 cw(c-46.73,4744.62) -21.35,4744.62 ccw(c3.27,4744.62) -20.04,4736.71 ccw(c3.27,4744.62) 3.27,4720 ICu.5@100,4720
CH340D-: ICu.6 MicroUSB插座.2 | length 589.7
  Top Layer w7: MicroUSB插座.2@-238.39,4445.59 -275.59,4445.59 cw(c-275.59,4455) -285,4455 -285,4504.96 cw(c-264.96,4504.96) -264.96,4525 -205,4525 ccw(c-205,4575) -155,4575
  Top Layer w8: -155,4575 -155,4595 cw(c-80,4595) -80,4670 ICu.6@100,4670